# Altium PCB PCB.PcbDoc (part 1 of 3)
Units mm, origin at the board's own origin, x right, y up, seen from the top; angles counter-clockwise.
Board outline 68.53 x 53.3 mm, 2 copper layers (Top Layer, Bottom Layer); 60 components, 48 nets, 220 pads, 55 vias.
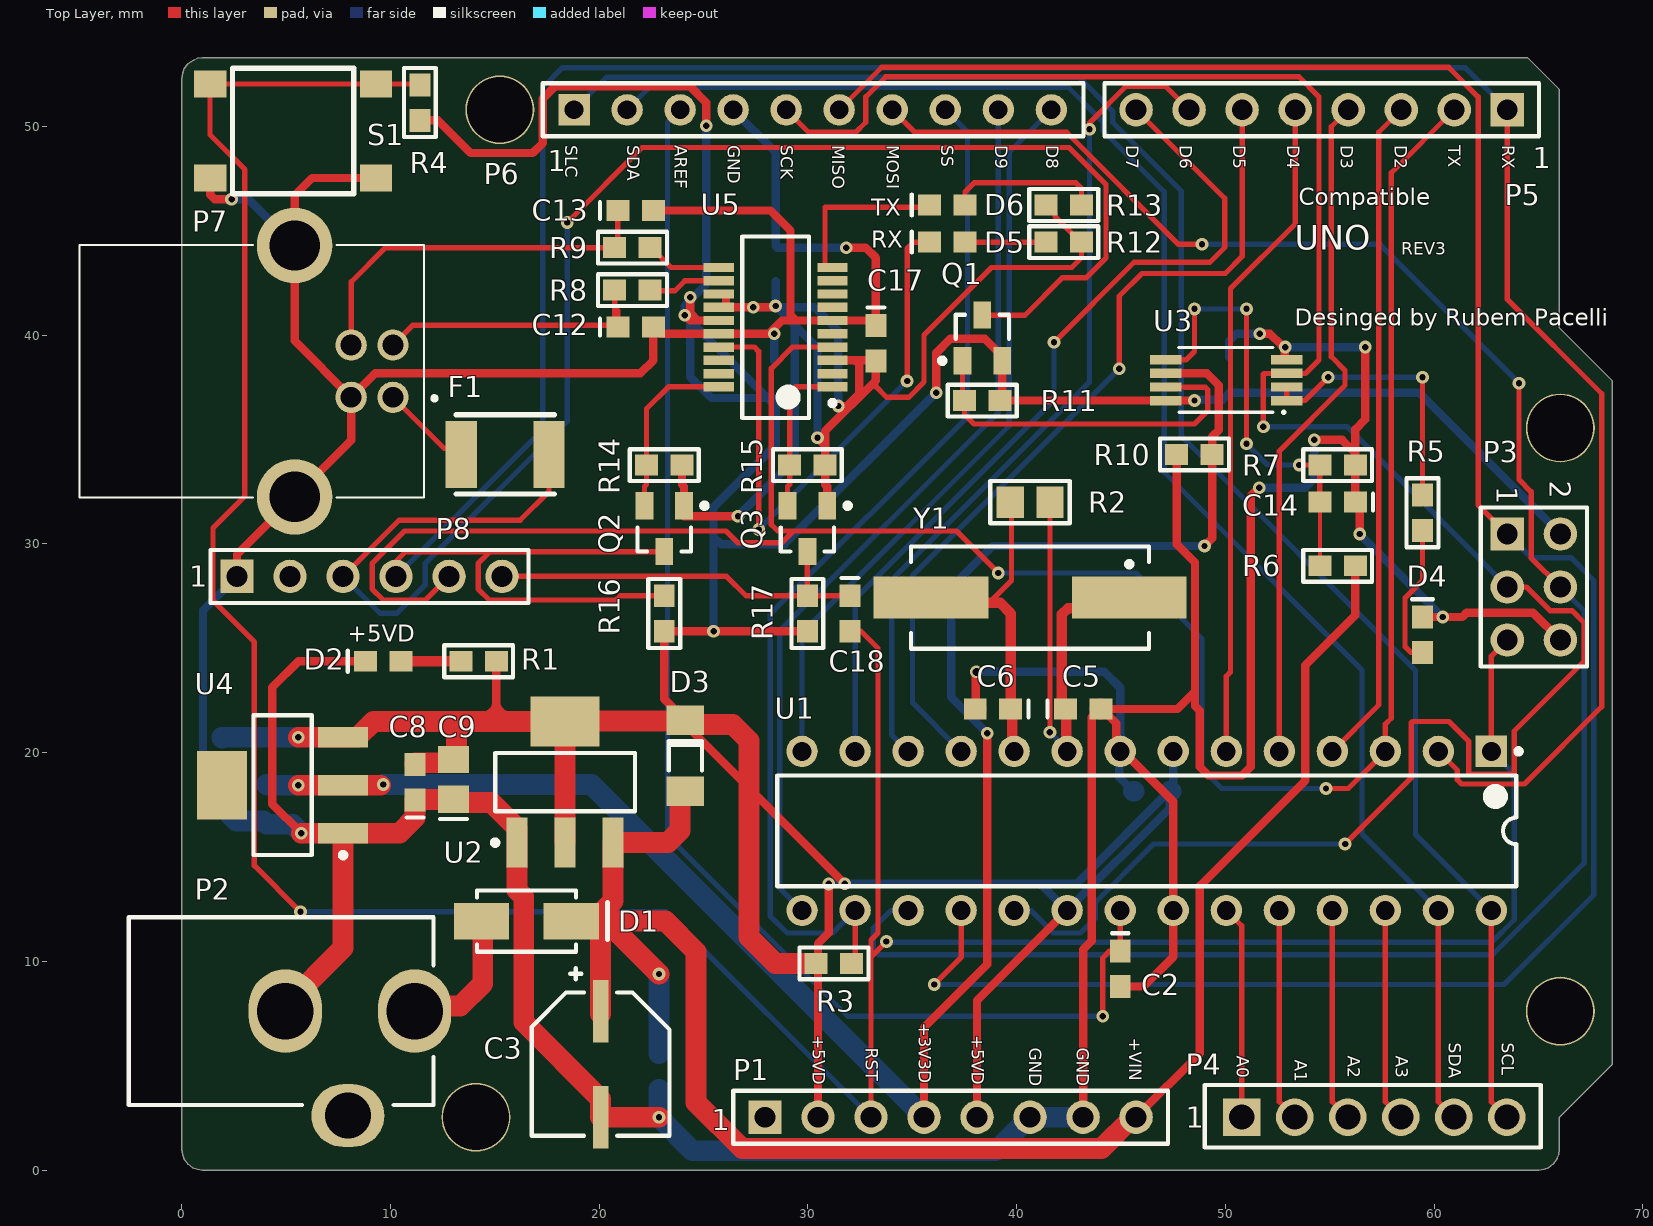
[diagram p0: Top Layer view]
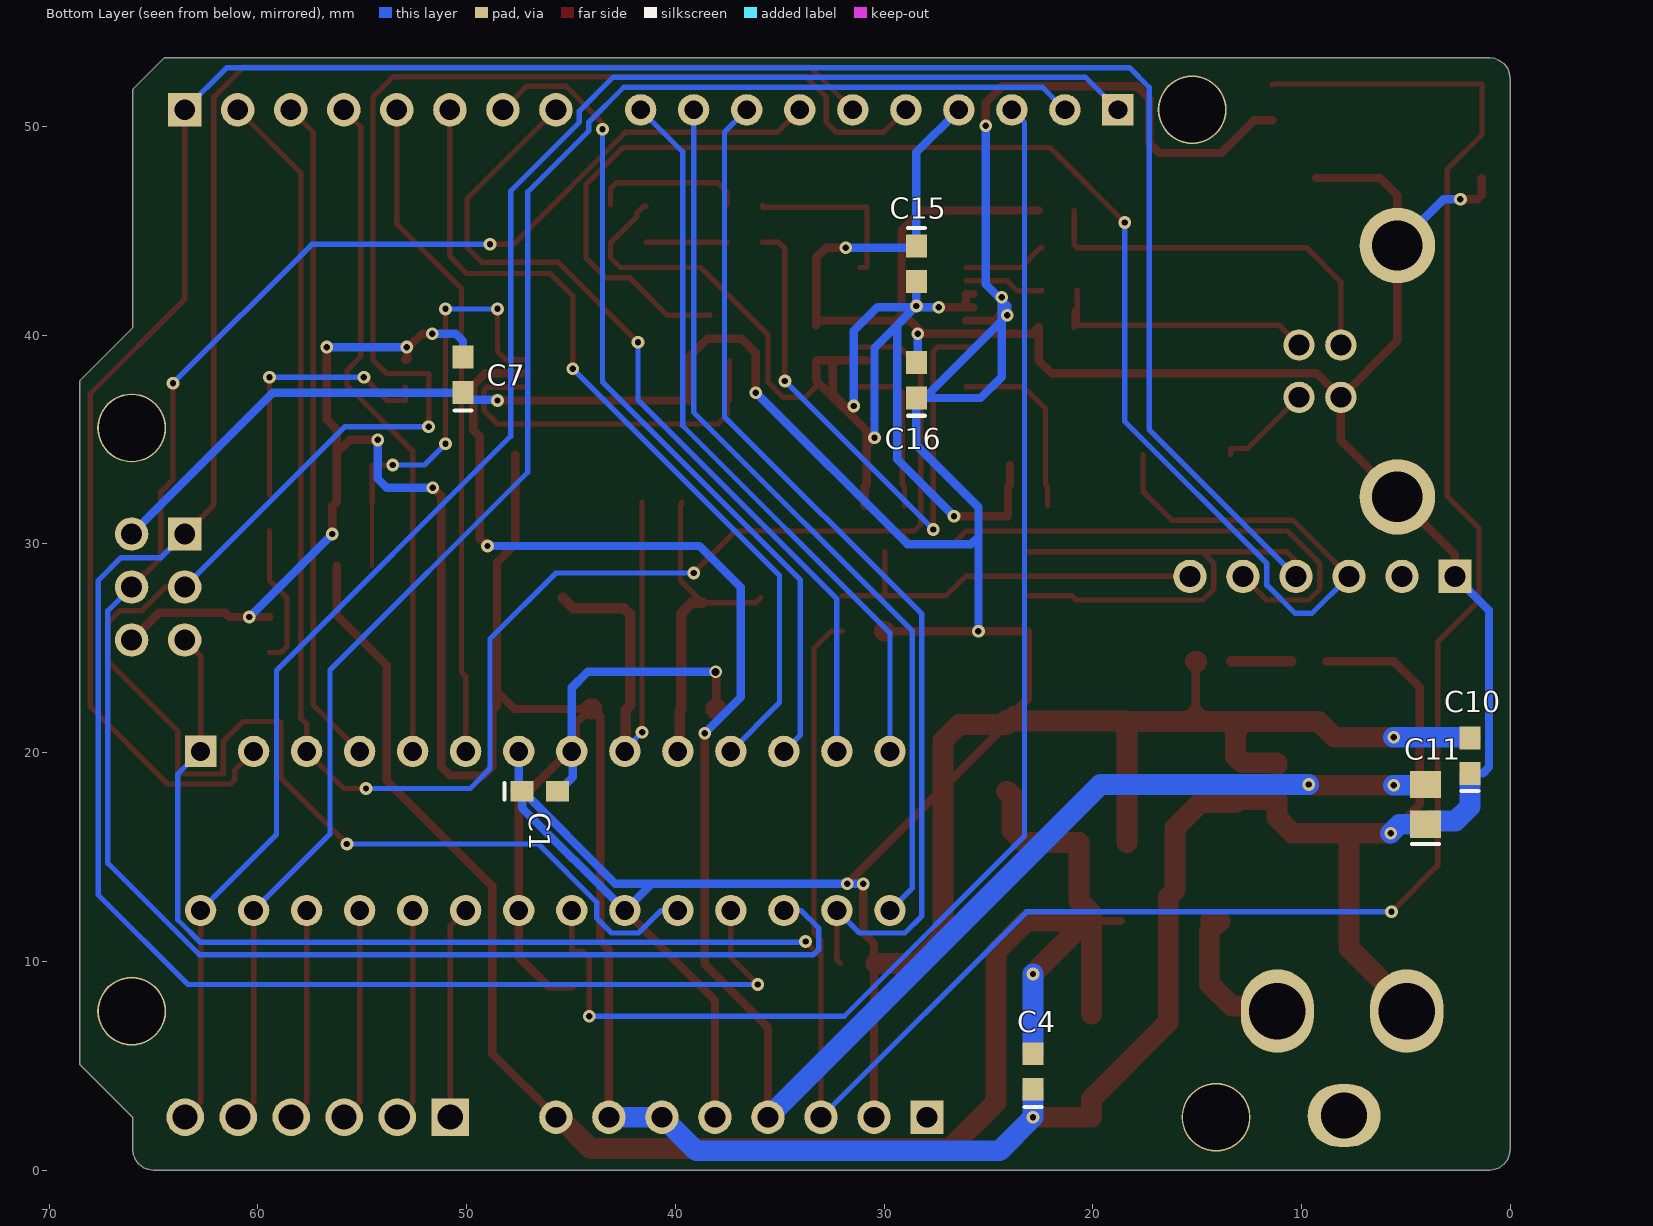
[diagram p1: Bottom Layer view, seen from below]
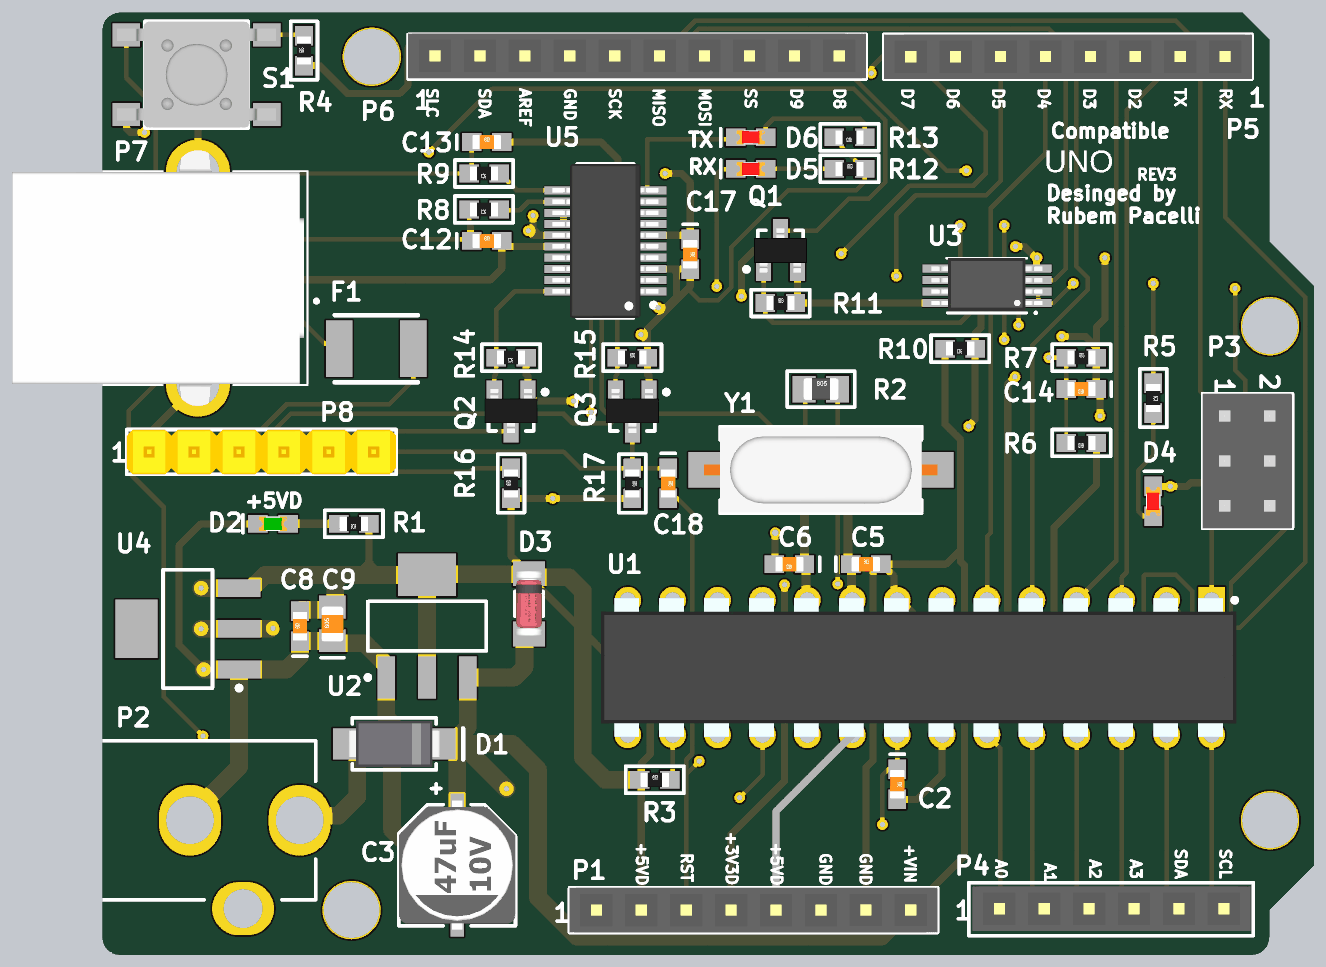
[diagram p3: 3D render of the assembled board from above, using the file's embedded part models]
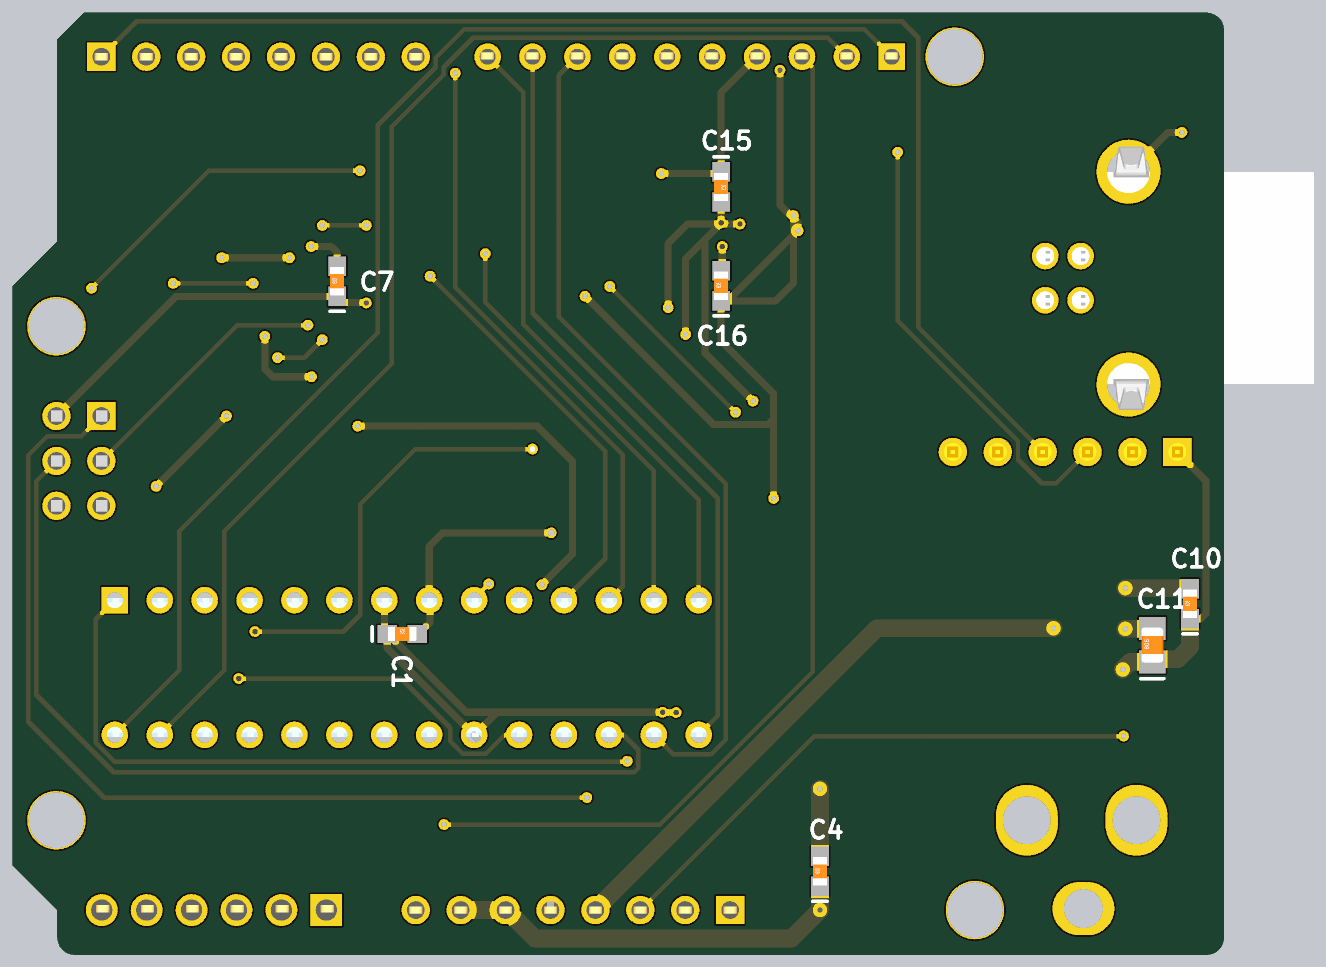
[diagram p4: 3D render of the assembled board from below, using the file's embedded part models]

## Layer stack, top to bottom
Top Solder: solder mask 0.0102, Solder Resist, Dk 3.5
Top Layer: signal copper 0.0356
Dielectric 1: dielectric 0.32, FR-4, Dk 4.8
Bottom Layer: signal copper 0.0356
Bottom Solder: solder mask 0.0102, Solder Resist, Dk 3.5

## Board outline
0.296,0.296 0.127,0.508 0.042,0.741 0,0.994 0,52.284 0.042,52.559 0.127,52.792 0.296,53.004 0.508,53.152 0.741,53.258 0.994,53.3 64.472,53.3 65.996,51.777 65.996,40.351 68.535,37.811 68.535,5.078 65.996,2.539 65.996,0.994 65.953,0.741 65.869,0.508 65.699,0.296 65.488,0.127 65.255,0.042 65.001,0 0.994,0 0.741,0.042 0.508,0.127

## Design rules (kind name [scope] priority, off if disabled: settings)
Clearance [All] p1: gap=0.178 ignorepadtopadclearanceinfootprint=FALSE
HoleSize [All] p1: absolutevalues=TRUE maxlimit=3.302 minlimit=0.025 maxpercent=80.000 minpercent=20.000
MinimumSolderMaskSliver [All] p1: minsoldermaskwidth=0.084
MinimumSolderMaskSliver "MinimumSolderMaskSliver - Top" [OnLayer('Top Layer') vs OnLayer('Top Layer')] p2: minsoldermaskwidth=0.084
MinimumSolderMaskSliver "MinimumSolderMaskSliver - Bottom" [OnLayer('Bottom Layer') vs OnLayer('Bottom Layer')] p3: minsoldermaskwidth=0.084
PolygonConnect [All] p1: connectstyle=Relief reliefconductorwidth=0.254 reliefentries=4 polygonreliefangle="90 Angle" airgapwidth=0.254
RoutingVias [All] p1: holewidth=0.305 width=0.61 viastyle="Through Hole" minholewidth=0.203 minwidth=0.406 maxholewidth=0.508 maxwidth=1.016
SilkToSilkClearance [All] p1: silktosilkclearance=0.127
SilkToSolderMaskClearance [IsPad] p1: minsilkscreentomaskgap=0.102 clearancetoexposedcopper=TRUE
SolderMaskExpansion [All] p1: expansion=0.102
Width "Power Width" [InNetClass('Power Nets')] p1: maxlimit=1 minlimit=0.254 preferedwidth=0.4
Width [All] p2: maxlimit=0.5 minlimit=0.2 preferedwidth=0.254
26 further rules are at their usual default settings.

## Classes and differential pairs
net class "Power Nets": +3V3D +3V3E +5VD +VIN GND NetD1_1
component class U_Sheet2: C12 C13 C14 C15 C16 C17 C18 D5 D6 F1 P7 P8 Q1 Q2 Q3 R6 R7 R8 R9 R10 R11 R12 R13 R14 R15 R16 R17 U5
component class U_Sheet1: C1 C2 C3 C4 C5 C6 C7 C8 C9 C10 C11 D1 D2 D3 D4 P1 P2 P3 P4 P5 P6 R1 R2 R3 R4 R5 S1 U1 U2 U3 U4 Y1

## Components (designator, comment, footprint, x,y, rotation, side; value= is the part's Value field where it differs from the comment)
C1 "0.1uF 25V" C1608[0603] 46.482,18.156 r180 bottom value=1
C2 "0.1uF 25V" C1608[0603] 44.958,9.652 r270 top value=1
C3 "47uF 25V" Cap_Al_SMD_C6_6.6x6.6mm 20.066,5.08 r90 top
C4 "0.1uF 50V" C1608[0603] 22.86,4.73 r90 bottom value=1
C5 "20pF" C1608[0603] 43.18,22.098 r0 top value=1
C6 "20pF" C1608[0603] 38.862,22.098 r180 top value=1
C7 "0.1uF 25V" C1608[0603] 50.165,38.1 r90 bottom value=1
C8 "0.1uF 50V" C1608[0603] 11.176,18.594 r90 top value=1
C9 "10uF 10V" C2012[0805] 13.015,18.721 r90 top value=1
C10 "0.1uF 25V" C1608[0603] 1.93,19.863 r90 bottom value=1
C11 "1uF 25V" C2012[0805] 4.064,17.526 r90 bottom
C12 "0.1uF 25V" C1608[0603] 21.739,40.386 r0 top value=1
C13 "0.1uF 25V" C1608[0603] 21.739,45.974 r0 top value=1
C14 "0.1uF 25V" C1608[0603] 55.372,32.004 r180 top value=1
C15 "0.1uF 25V" C1608[0603] 28.448,43.434 r270 bottom value=1
C16 "0.1uF 25V" C1608[0603] 28.448,37.846 r90 bottom value=1
C17 "0.1uF 25V" C1608[0603] 33.25,39.624 r270 top value=1
C18 "0.1uF 25V" C1608[0603] 32.004,26.67 r270 top value=1
D1 "B160-13-F" DO214AC 16.51,11.938 r0 top
D2 "LED" LED-0603-G 9.652,24.384 r180 top
D3 "" SOD-80/MLL34 24.13,19.856 r90 top
D4 "LED" LED-0603-R 59.436,25.654 r90 top
D5 "RX" LED-0603-R 36.668,44.461 r180 top
D6 "TX" LED-0603-R 36.668,46.239 r180 top
F1 "" MF-MSMF050 15.494,34.29 r0 top
P1 "Header 8" HDR1X8F 27.94,2.54 r0 top
P2 "Barrel Jack" BARREL2.5 -2.54,7.62 r0 top
P3 "ICSP" HDR2X3M 63.5,30.48 r270 top
P4 "Header 6" HDR1X6F 50.628,2.34 r0 top
P5 "IOL" HDR1X8F 63.5,50.8 r180 top
P6 "I/O" HDR1X10 18.796,50.8 r0 top
P7 "" USBB1HSB6 3.658,38.278 r270 top
P8 "PROG" HDR1X6m 2.646,28.448 r0 top
Q1 "FDN340P" SOT23 38.354,39.878 r0 top
Q2 "BSS138" SOT23 23.114,30.734 r180 top
Q3 "BSS138" SOT23 29.972,30.734 r180 top
R1 "270R" R1608[0603] 14.224,24.384 r180 top value=0
R2 "1M" R2012[0805] 40.64,32.004 r0 top value=0
R3 "100k" R1608[0603] 31.242,9.906 r0 top value=0
R4 "10k" R1608[0603] 11.408,51.147 r90 top value=0
R5 "560R" R1608[0603] 59.436,31.496 r270 top value=0
R6 "10k" R1608[0603] 55.372,28.956 r180 top value=0
R7 "10k" R1608[0603] 55.372,33.782 r0 top value=0
R8 "10k" R1608[0603] 21.59,42.164 r180 top value=0
R9 "10k" R1608[0603] 21.59,44.196 r180 top value=0
R10 "10k" R1608[0603] 48.514,34.29 r180 top value=0
R11 "10k" R1608[0603] 38.352,36.871 r0 top value=0
R12 "1k" R1608[0603] 42.256,44.461 r0 top value=0
R13 "1k" R1608[0603] 42.256,46.239 r180 top value=0
R14 "10k" R1608[0603] 23.116,33.782 r180 top value=0
R15 "10k" R1608[0603] 29.972,33.782 r0 top value=0
R16 "10k" R1608[0603] 23.114,26.67 r90 top value=0
R17 "10k" R1608[0603] 29.972,26.67 r270 top value=0
S1 "" PB-SW-SMT 5.334,49.784 r180 top
U1 "ATmega328P-PU" DIP28 46.228,16.256 r270 top
U2 "Linear Regulator" SOT223_N#1 18.365,18.594 r90 top
U3 "Amp-Op" TSSOP8 50.038,37.846 r180 top
U4 "Linear Regulator" SOT223_N#2 4.831,18.445 r180 top
U5 "FT231XS-R" "SSOP - 20" 28.448,40.386 r180 top
Y1 "16MHz" CRYSTAL-HC49/4H_SMX 40.64,27.432 r180 top

## Footprints (in the part's own frame and the unit in brackets; to place one, negate y for a bottom-side part, rotate by r counter-clockwise, add the part's x,y. Pads: shape width x height; smd on the part's side, far side on the other; paste and mask are expansions set on the pad)
BARREL2.5 [mm] "DC Power Jack, 2.5mm, KLD Series, PCB Mount"
  oval 3.5x4 hole 2.7: 1(13.7,0) 2(7.5,0)
  oval 3.5x3 hole 2.2: 3(10.5,-5)
  silkscreen extent 0,-4.5 14.6,4.5, body extent 0,-4.45 14.54,4.56, height 11
C1608[0603] [mm] "Chip Capacitor; Body 1.6 x 0.8 mm (LxW typ)"
  rect 1.1x1 smd: 1(-0.85,0) 2(0.85,0)
  silkscreen extent -1.7,-0.4 -1.7,0.4, body extent -0.8,-0.4 0.8,0.4, height 0.3
C2012[0805] [mm] "Chip Capacitor; Body 2.0 x 1.2 mm (LxW typ)"
  rect 1.3x1.5 smd: 1(-0.95,0) 2(0.95,0)
  silkscreen extent -1.9,-0.65 -1.9,0.65, body extent -1,-0.62 1,0.63, height 0.8
Cap_Al_SMD_C6_6.6x6.6mm [mm]
  rect 3x0.75 smd: 1(2.54,0) 2(-2.54,0)
  silkscreen extent -3.43,-3.3 4.6,3.3, body extent -3.65,-3.3 3.65,3.3, height 5.9
CRYSTAL-HC49/4H_SMX [mm] "Quartz Crystal, SM; Body 13.4 (inc. leads) x 4.9 mm (LxW max)"
  rect 5.5x2 smd: 1(-4.75,0) 2(4.75,0)
  silkscreen extent -5.7,-2.45 5.7,2.45, body extent -6.6,-2.4 6.6,2.4, height 4.32
DIP28 [mm] "28-Pin Plastic Dual In-Line Package (PDIP)"
  rect 1.5x1.5 hole 0.9: 1(-3.81,16.51)
  round 1.5 hole 0.9: 2(-3.81,13.97) 3(-3.81,11.43) 4(-3.81,8.89) 5(-3.81,6.35) 6(-3.81,3.81) 7(-3.81,1.27) 8(-3.81,-1.27) 9(-3.81,-3.81) 10(-3.81,-6.35) 11(-3.81,-8.89) 12(-3.81,-11.43) 13(-3.81,-13.97) 14(-3.81,-16.51) 15(3.81,-16.51) 16(3.81,-13.97) 17(3.81,-11.43) 18(3.81,-8.89) 19(3.81,-6.35) 20(3.81,-3.81) 21(3.81,-1.27) 22(3.81,1.27) 23(3.81,3.81) 24(3.81,6.35) 25(3.81,8.89) 26(3.81,11.43) 27(3.81,13.97) 28(3.81,16.51)
  silkscreen extent -3.93,-17.7 2.65,17.94, body extent -3.94,-18.03 3.94,17.91, height 4.65
DO214AC [mm]
  rect 2.65x1.75 smd: 1(-2.15,0) 2(2.15,0)
  silkscreen extent -2.37,-1.47 3.89,1.47, body extent -2.6,-1.3 2.6,1.3, height 2.4
HDR1X6F [mm] "Manufacturer Part Number  PPPC061LFBN-RC"
  rect 1.8x1.8 / inner round 1.8 / far side rect 1.8x1.8 hole 1.2: 1(0.15,0.2)
  round 1.8 hole 1.2: 2(2.69,0.2) 3(5.23,0.2) 4(7.77,0.2) 5(10.31,0.2) 6(12.85,0.2)
  silkscreen extent -1.62,-1.25 14.47,1.75, body extent -1.42,-0.99 14.32,1.55, height 8.9
HDR1X6m [mm] "Connector; Header; 6 Position"
  rect 1.6x1.6 hole 1: 1(0,0)
  round 1.6 hole 1: 2(2.54,0) 3(5.08,0) 4(7.62,0) 5(10.16,0) 6(12.7,0)
  silkscreen extent -1.27,-1.27 13.97,1.27, body extent -1.27,-1.27 13.97,1.27, height 9.55
HDR1X8F [mm] "Connector; Header; 8 Position"
  rect 1.6x1.6 hole 1: 1(0,0)
  round 1.6 hole 1: 2(2.54,0) 3(5.08,0) 4(7.62,0) 5(10.16,0) 6(12.7,0) 7(15.24,0) 8(17.78,0)
  silkscreen extent -1.52,-1.27 19.3,1.27, body extent -1.52,-1.27 19.3,1.27, height 8.55
HDR1X10 [mm] "Connector; Header; 10 Position"
  rect 1.5x1.5 hole 0.9: 1(0,0)
  round 1.5 hole 0.9: 2(2.54,0) 3(5.08,0) 4(7.62,0) 5(10.16,0) 6(12.7,0) 7(15.24,0) 8(17.78,0) 9(20.32,0) 10(22.86,0)
  silkscreen extent -1.5,-1.27 24.4,1.27, body extent -1.5,-1.22 24.4,1.32, height 8.5
HDR2X3M [mm] "Connector; Header; 3x2 Position"
  rect 1.6x1.6 hole 1: 1(0,0)
  round 1.6 hole 1: 2(0,2.54) 3(2.54,0) 4(2.54,2.54) 5(5.08,0) 6(5.08,2.54)
  silkscreen extent -1.27,-1.27 6.35,3.81, body extent -1.27,-1.27 6.35,3.77, height 8.5
LED-0603-G [mm] "0603 Green LED"
  rect 1.1x1 smd: 1(-0.85,0) 2(0.85,0)
  silkscreen extent 1.7,-0.5 1.7,0.5, body extent -0.8,-0.4 0.8,0.4, height 0.6
LED-0603-R [mm] "0603 Red LED"
  rect 1.1x1 smd: 1(-0.85,0) 2(0.85,0)
  silkscreen extent 1.7,-0.5 1.7,0.5, body extent -0.8,-0.4 0.8,0.4, height 0.6
MF-MSMF050 [mm] "Resettable Fuse"
  rect 1.5x3.2 smd: 1(-2.1,0) 2(2.1,0)
  silkscreen extent -2.35,-1.9 2.35,1.9, body extent -2.35,-1.7 2.35,1.7, height 0.85
PB-SW-SMT [mm] "SMT TACT SWITCH 6MM"
  rect 1.55x1.3 smd: 1(-3.975,2.25) 1(3.975,2.25) 2(-3.975,-2.25) 2(3.975,-2.25)
  silkscreen extent -2.9,-3 2.9,3, body extent -4.5,-3 4.5,3, height 4.3
R1608[0603] [mm] "Chip Resistor; Body 1.6 x 0.8 mm (LxW typ)"
  rect 1.1x1 smd: 1(-0.85,0) 2(0.85,0)
  silkscreen extent -1.65,-0.76 1.65,0.76, body extent -0.8,-0.4 0.8,0.4, height 0.3
R2012[0805] [mm] "Chip Resistor; Body 2.0 x 1.3 mm (LxW typ)"
  rect 1.3x1.5 smd: 1(-0.95,0) 2(0.95,0)
  silkscreen extent -1.9,-1.02 1.91,1.02, body extent -1,-0.62 1,0.63, height 0.8
SOD-80/MLL34 [mm] "Metal Electrode Face (MELF) Diode; Body 3.5 x 1.7 mm (LxDia)"
  rect 1.4x1.8 smd: 1(-1.7,0) 2(1.7,0)
  silkscreen extent -0.7,-0.8 0.7,0.8, body extent -1.82,-0.8 1.88,0.8, height 1.6
SOT23 [mm] "SOT-23; 3 Leads; Body 3.0 x 2.6 mm, inc. leads (LxW max)"
  rect 0.85x1.3 smd: 1(-0.95,-1.1) 2(0.95,-1.1) 3(0,1.1)
  silkscreen extent -2.05,-1.22 1.27,1.1, body extent -1.5,-1.29 1.5,1.21, height 1.12
SOT223_N#1 [mm] "SOT223, 4-Leads, Body 6.5x3.5mm, Pitch 2.3mm, Lead Span 7mm, IPC Medium Density"
  rect 2.4x1 smd: 1(-2.9,2.3) 2(-2.9,0) 3(-2.9,-2.3)
  rect 2.4x3.3 smd: 2(2.9,0)
  silkscreen extent -3.02,-3.35 1.4,3.47, body extent -1.85,-3.35 1.85,3.35, height 1.7
SOT223_N#2 [mm] "SOT223, 4-Leads, Body 6.5x3.5mm, Pitch 2.3mm, Lead Span 7mm, IPC Medium Density"
  rect 2.4x1 smd: 1(-2.9,2.3) 2(-2.9,0) 3(-2.9,-2.3)
  rect 2.4x3.3 smd: 4(2.9,0)
  silkscreen extent -3.03,-3.35 1.4,3.47, body extent -1.85,-3.35 1.85,3.35, height 1.7
"SSOP - 20" [mm] "SOP, 20-Leads, Body 8,65x3,90mm, Pitch 0,64mm, IPC Medium Density"
  rect 1.45x0.45 smd mask+0.05: 1(-2.725,2.857) 2(-2.725,2.222) 3(-2.725,1.587) 4(-2.725,0.952) 5(-2.725,0.317) 6(-2.725,-0.318) 7(-2.725,-0.953) 8(-2.725,-1.588) 9(-2.725,-2.223) 10(-2.725,-2.858) 11(2.725,-2.858) 12(2.725,-2.223) 13(2.725,-1.588) 14(2.725,-0.953) 15(2.725,-0.318) 16(2.725,0.317) 17(2.725,0.952) 18(2.725,1.587) 19(2.725,2.222) 20(2.725,2.857)
  silkscreen extent -2.85,-4.35 1.6,4.35, body extent -3,-4.35 3,4.35, height 1.75
TSSOP8 [mm]
  rect 1.5x0.45 smd paste+0 mask+0.05: 1(-2.9,0.975)
  rect 1.5x0.45 smd mask+0.05: 2(-2.9,0.325) 3(-2.9,-0.325) 4(-2.9,-0.975) 5(2.9,-0.975) 6(2.9,-0.325) 7(2.9,0.325) 8(2.9,0.975)
  silkscreen extent -2.75,-1.56 2.28,1.54, body extent -3.12,-1.58 3.16,1.42, height 1.09
USBB1HSB6 [mm]
  round 1.5 hole 1: 1(1.25,6.46) 2(-1.25,6.46) 3(-1.25,4.46) 4(1.25,4.46)
  round 3.615 hole 2.41: 5(-6.02,1.75) 6(6.02,1.75)
  silkscreen extent -6.05,-8.55 6.05,8.55, body extent -7.45,-8.75 7.45,7.75, height 10.9

## Part data
C1 C2 C7 C10 C12 C13 C15 C16 C17: library part C, "Capacitor Decoupling", Capacitance=100nF, Case/Package=0603, Case Code (Metric)=1608, Dielectric=X7R, Manufacturer Part Number=GCM188R71E104KA57D, Max Operating Temperature=125°C, Min Operating Temperature=-55°C, Package Quantity=4000, Ratings=AEC-Q200, Supplier Part Number 1=GCM188R71E104KA57D-ND, Tolerance=10%, Voltage=25V, Case Code (Imperial)=0603, Depth=0.8mm, Height=0.8mm, Lead Free="Lead Free", Length=1.6mm, Mount="Surface Mount", Packaging="Tape and Reel", Radiation Hardening=No, Stock 1=0, Supplier 1=Digi-Key, Termination=SMD/SMT, Thickness=0.035inch, Voltage Rating=25V, Voltage Rating (DC)=25V, Width=0.8mm
C3: library part CP, "Polarized Capacitor - Power Entry", Capacitance=47uF, Case/Package=Radial, Leakage Current=11.7uA, Manufacturer Part Number=EEE-HA1E470WP, Max Operating Temperature=105°C, Min Operating Temperature=-40°C, Package Quantity=1, Ripple Current=70mA, Supplier Part Number 1=PCE4206DKR-ND, Tolerance=20%, Voltage=25V, ComponentLink1Description=http://uk.rs-online.com/webdocs/102e/0900766b8102e3f9.pdf, ComponentLink1URL=http://uk.rs-online.com/webdocs/102e/0900766b8102e3f9.pdf, ComponentLink2Description=http://industrial.panasonic.com/www-data/pdf/ABA0000/ABA0000CE3.pdf, ComponentLink2URL=http://industrial.panasonic.com/www-data/pdf/ABA0000/ABA0000CE3.pdf, ComponentLink3Description=http://www.farnell.com/datasheets/1446029.pdf, ComponentLink3URL=http://www.farnell.com/datasheets/1446029.pdf, ComponentLink4Description=http://www.farnell.com/datasheets/2059663.pdf, ComponentLink4URL=http://www.farnell.com/datasheets/2059663.pdf, ComponentLink5Description=https://www.alliedelec.com/m/d/7ecf71cebe655f70ab90926cc286bede.pdf, ComponentLink5URL=https://www.alliedelec.com/m/d/7ecf71cebe655f70ab90926cc286bede.pdf, ComponentLink6Description=http://www.jameco.com/Jameco/Products/ProdDS/1984291.pdf, ComponentLink6URL=http://www.jameco.com/Jameco/Products/ProdDS/1984291.pdf, Contact Plating=Tin, Diameter=6.3mm, Height=5.4mm, Height - Seated (Max)=0.213inch, Lead Diameter=0.65mm, Lead Free="Lead Free", Lead Pitch=1.8mm, Length=5.5mm, Life (Hours)=1000Hour, Mount="Surface Mount", Packaging="Tape and Reel", Pricing 1="1=0.43, 10=0.301, 100=0.1808, 500=0.13558 (USD)", Radiation Hardening=No, REACH SVHC=Unknown, Ripple Current (AC)=70mA, Stock 1=156126, Supplier 1=Digi-Key, Termination=SMD/SMT, Voltage Rating=25V, Voltage Rating (DC)=25V, Width=650um
C4: library part C, "Decoupling Capacitor", Capacitance=100nF, Case/Package=0603, Case Code (Metric)=1608, Dielectric=X7R, Dielectric Material=Ceramic, Manufacturer Part Number=C1608X7R1H104M080AA, Max Operating Temperature=125°C, Min Operating Temperature=-55°C, Package Quantity=1, Supplier Part Number 1=445-5098-6-ND, Tolerance=20%, Voltage Rating=50V, Case Code (Imperial)=0603, ComponentLink1Description=http://www.farnell.com/datasheets/1571323.pdf, ComponentLink1URL=http://www.farnell.com/datasheets/1571323.pdf, ComponentLink2Description=https://product.tdk.com/info/en/catalog/spec/mlccspec_commercial_general_midvoltage_en.pdf, ComponentLink2URL=https://product.tdk.com/info/en/catalog/spec/mlccspec_commercial_general_midvoltage_en.pdf, ComponentLink3Description=http://www.tdk.co.jp/tefe02/e412_c.pdf, ComponentLink3URL=http://www.tdk.co.jp/tefe02/e412_c.pdf, Composition=Ceramic, Depth=0.8mm, Height=0.8mm, Lead Free="Lead Free", Length=1.6mm, Mount="Surface Mount", Number of Pins=2, Packaging="Tape and Reel", Pricing 1="1=0.1, 10=0.074, 100=0.0331, 500=0.02366, 1000=0.0186 (USD)", Radiation Hardening=No, REACH SVHC="No SVHC", Stock 1=0, Supplier 1=Digi-Key, Termination=SMD/SMT, Thickness=0.037inch, Voltage Rating (DC)=50V, Weight=7.1E-05oz, Width=0.031inch
C5 C6: library part C, "Capacitor Crystal", Case/Package=0603, Case Code (Metric)=1608, Dielectric=C0G, Manufacturer Part Number=CL10C200JB8NNNC, Max Operating Temperature=125°C, Min Operating Temperature=-55°C, Package Quantity=1, Supplier Part Number 1=1276-1187-6-ND, Temperature Coefficient=300ppm/°C, Tolerance=5%, Voltage=50V, Capacitance=20pF, Case Code (Imperial)=0603, Depth=0.8mm, Height=0.8mm, Length=1.6mm, Mount="Surface Mount", Packaging="Tape and Reel", Pricing 1="1=0.1, 10=0.048, 100=0.0214, 500=0.01532, 1000=0.01203 (USD)", Radiation Hardening=No, Stock 1=40000, Supplier 1=Digi-Key, Thickness=0.035inch, Voltage Rating=50V, Width=0.031inch
C8: library part C, "Capacitor Decoupling", Capacitance=100nF, Case/Package=0603, Case Code (Metric)=1608, Dielectric=X7R, Dielectric Material=Ceramic, Manufacturer Part Number=C1608X7R1H104M080AA, Max Operating Temperature=125°C, Min Operating Temperature=-55°C, Package Quantity=1, Supplier Part Number 1=445-5098-6-ND, Tolerance=20%, Voltage Rating=50V, Case Code (Imperial)=0603, ComponentLink1Description=http://www.farnell.com/datasheets/1571323.pdf, ComponentLink1URL=http://www.farnell.com/datasheets/1571323.pdf, ComponentLink2Description=https://product.tdk.com/info/en/catalog/spec/mlccspec_commercial_general_midvoltage_en.pdf, ComponentLink2URL=https://product.tdk.com/info/en/catalog/spec/mlccspec_commercial_general_midvoltage_en.pdf, ComponentLink3Description=http://www.tdk.co.jp/tefe02/e412_c.pdf, ComponentLink3URL=http://www.tdk.co.jp/tefe02/e412_c.pdf, Composition=Ceramic, Depth=0.8mm, Height=0.8mm, Lead Free="Lead Free", Length=1.6mm, Mount="Surface Mount", Number of Pins=2, Packaging="Tape and Reel", Pricing 1="1=0.1, 10=0.074, 100=0.0331, 500=0.02366, 1000=0.0186 (USD)", Radiation Hardening=No, REACH SVHC="No SVHC", Stock 1=0, Supplier 1=Digi-Key, Termination=SMD/SMT, Thickness=0.037inch, Voltage Rating (DC)=50V, Weight=7.1E-05oz, Width=0.031inch
C9: library part C, "Capacitor Decoupling", Capacitance=10uF, Case/Package=0603, Case Code (Metric)=1608, Dielectric Material=Ceramic, Manufacturer Part Number=C1608JB1A106K080AC, Max Operating Temperature=85°C, Min Operating Temperature=-25°C, Package Quantity=4000, Supplier Part Number 1=445-11201-6-ND, Tolerance=10%, Voltage Rating=10V, Case Code (Imperial)=0603, ComponentLink1Description=https://product.tdk.com/en/products/common/pdf/mlcc_partnumber_description.pdf, ComponentLink1URL=https://product.tdk.com/en/products/common/pdf/mlcc_partnumber_description.pdf, Composition=Ceramic, Height=0.8mm, Lead Free="Lead Free", Length=0.063inch, Mount="Surface Mount", Packaging="Tape and Reel", Pricing 1="1=0.62, 10=0.431, 100=0.2588, 500=0.19406, 1000=0.16388 (USD)", Stock 1=22257, Supplier 1=Digi-Key, Termination=SMD/SMT, Thickness=0.035inch, Voltage Rating (DC)=10V, Width=0.8mm
C11: library part C, "Capacitor Decoupling", Capacitance=1uF, Case/Package=0805, Case Code (Metric)=2012, Dielectric=X7R, Dielectric Material=Ceramic, Manufacturer=TDK, Manufacturer Part Number=C2012X7R1E105K125AB, Max Operating Temperature=125°C, Min Operating Temperature=-55°C, Package Quantity=1, Supplier Part Number 1=445-1354-1-ND, Tolerance=10%, Voltage=25V, Case Code (Imperial)=0805, Composition=Ceramic, Depth=1.25mm, Height=1.25mm, Lead Free="Lead Free", Length=2mm, Mount="Surface Mount", Number of Pins=2, Packaging="Tape and Reel", Pricing 1="1=0.16, 10=0.115, 100=0.054, 500=0.0379, 1000=0.03137 (USD)", Radiation Hardening=No, REACH SVHC="No SVHC", Stock 1=0, Supplier 1=Digi-Key, Termination=SMD/SMT, Thickness=0.057inch, Voltage Rating=25V, Voltage Rating (DC)=25V, Weight=0.000194oz, Width=1.25mm
C14: library part C, "Decoupling Capacitor", Capacitance=100nF, Case/Package=0603, Case Code (Metric)=1608, Dielectric=X7R, Manufacturer Part Number=GCM188R71E104KA57D, Max Operating Temperature=125°C, Min Operating Temperature=-55°C, Package Quantity=4000, Ratings=AEC-Q200, Supplier Part Number 1=GCM188R71E104KA57D-ND, Tolerance=10%, Voltage=25V, Case Code (Imperial)=0603, Depth=0.8mm, Height=0.8mm, Lead Free="Lead Free", Length=1.6mm, Mount="Surface Mount", Packaging="Tape and Reel", Radiation Hardening=No, Stock 1=0, Supplier 1=Digi-Key, Termination=SMD/SMT, Thickness=0.035inch, Voltage Rating=25V, Voltage Rating (DC)=25V, Width=0.8mm
C18: library part C, "Capacitor Coupling", Capacitance=100nF, Case/Package=0603, Case Code (Metric)=1608, Dielectric=X7R, Manufacturer Part Number=GCM188R71E104KA57D, Max Operating Temperature=125°C, Min Operating Temperature=-55°C, Package Quantity=4000, Ratings=AEC-Q200, Supplier Part Number 1=GCM188R71E104KA57D-ND, Tolerance=10%, Voltage=25V, Case Code (Imperial)=0603, Depth=0.8mm, Height=0.8mm, Lead Free="Lead Free", Length=1.6mm, Mount="Surface Mount", Packaging="Tape and Reel", Radiation Hardening=No, Stock 1=0, Supplier 1=Digi-Key, Termination=SMD/SMT, Thickness=0.035inch, Voltage Rating=25V, Voltage Rating (DC)=25V, Width=0.8mm
D1: library part D, "Diode", Average Rectified Current=1A, Capacitance=110pF, Case/Package=SMA, Forward Voltage=700mV, Max Forward Surge Current (Ifsm)=30A, Max Operating Temperature=150°C, Max Repetitive Reverse Voltage (Vrrm)=60V, Min Operating Temperature=-65°C, Package Quantity=5000, Peak Reverse Current=500uA, Supplier Part Number 1=B160-FDIDKR-ND, ComponentLink1Description=https://www.diodes.com/assets/Datasheets/ds13002.pdf, ComponentLink1URL=https://www.diodes.com/assets/Datasheets/ds13002.pdf, ComponentLink2Description=http://www.farnell.com/datasheets/1911815.pdf, ComponentLink2URL=http://www.farnell.com/datasheets/1911815.pdf, ComponentLink3Description=http://www.diodes.com/datasheets/ds13002.pdf, ComponentLink3URL=http://www.diodes.com/datasheets/ds13002.pdf, ComponentLink4Description=http://www.diodes.com///datasheets/ds13002.pdf, ComponentLink4URL=http://www.diodes.com///datasheets/ds13002.pdf, Contact Plating=Matte,Tin, Current Rating=1A, Element Configuration=Single, Forward Current=1A, Height=2.1mm, Lead Free="Lead Free", Length=4.6mm, Manufacturer Part Number=B160-13-F, Max Reverse Voltage (DC)=60V, Mount="Surface Mount", Number of Pins=2, Output Current=1A, Packaging="Tape and Reel", Peak Non-Repetitive Surge Current=30A, Polarity=Standard, Pricing 1="1=0.37, 10=0.304, 100=0.1615, 500=0.10622, 1000=0.07223 (USD)", Radiation Hardening=No, REACH SVHC="No SVHC", Stock 1=242650, Supplier 1=Digi-Key, Termination=SMD/SMT, Voltage Rating (DC)=60V, Weight=0.002258oz, Width=2.92mm
D2: "LED indicador visual", Case/Package=0603, Case Code (Metric)=1608, Color=Blue, Forward Current=20mA, Forward Voltage=3.3V, Lens Color=Clear,Colorless, Manufacturer=Kingbright, Manufacturer Part Number=APT1608QBC/D, Max Operating Temperature=85°C, Min Operating Temperature=-40°C, Package Quantity=2000, Supplier Part Number 1=604-APT1608QBC/D, Case Code (Imperial)=0603, ComponentLink1Description=http://www.kingbrightusa.com/images/catalog/SPEC/APT1608QBC-D.pdf, ComponentLink1URL=http://www.kingbrightusa.com/images/catalog/SPEC/APT1608QBC-D.pdf, ComponentLink2Description=http://www.mouser.com/ds/2/216/APT1608QBC-D-65281.pdf, ComponentLink2URL=http://www.mouser.com/ds/2/216/APT1608QBC-D-65281.pdf, Dominant Wavelength=465nm, Height=0.75mm, Illumination Color=Blue, Lead Free="Lead Free", Length=1.6mm, Lens Style=Clear,Flat, Lens Transparency=Clear, Luminous Intensity=100mcd, Mount="Surface Mount", Number of LEDs=1, Number of Pins=2, Packaging="Tape and Reel", Pricing 1="1=0.49, 10=0.35, 50=0.35, 100=0.229, 1000=0.129, 10000=0.091 (USD)", Stock 1=33663, Supplier 1=Mouser, Test Current=20mA, Viewing Angle=120°, Width=0.8mm
D3: library part D, "Diode Protection", Average Rectified Current=200mA, Current=2A, Forward Voltage=1V, Manufacturer Part Number=LL4148, Max Operating Temperature=175°C, Max Repetitive Reverse Voltage (Vrrm)=100V, Min Operating Temperature=-65°C, Package Quantity=1, Peak Reverse Current=25nA, Power Dissipation=500mW, Supplier Part Number 1=512-LL4148, ComponentLink1Description=http://www.farnell.com/datasheets/1730036.pdf, ComponentLink1URL=http://www.farnell.com/datasheets/1730036.pdf, ComponentLink2Description=https://www.fairchildsemi.com/datasheets/LL/LL4148.pdf, ComponentLink2URL=https://www.fairchildsemi.com/datasheets/LL/LL4148.pdf, ComponentLink3Description=http://www.jameco.com/Jameco/Products/ProdDS/94908.pdf, ComponentLink3URL=http://www.jameco.com/Jameco/Products/ProdDS/94908.pdf, ComponentLink4Description=http://www.mouser.com/ds/2/149/LL4148-70504.pdf, ComponentLink4URL=http://www.mouser.com/ds/2/149/LL4148-70504.pdf, ComponentLink5Description=http://www.farnell.com/datasheets/2037793.pdf, ComponentLink5URL=http://www.farnell.com/datasheets/2037793.pdf, ComponentLink6Description=https://www.verical.com/server-webapp/html/getDatasheet?partID=110057, ComponentLink6URL=https://www.verical.com/server-webapp/html/getDatasheet?partID=110057, ComponentLink7Description=http://www.farnell.com/datasheets/1896420.pdf, ComponentLink7URL=http://www.farnell.com/datasheets/1896420.pdf, Contact Plating=Matte,Tin, Element Configuration=Single, Forward Current=200mA, Height=1.5mm, Lead Free="Lead Free", Length=3.6mm, Max Forward Surge Current (Ifsm)=2A, Max Reverse Voltage (DC)=100V, Max Surge Current=2A, Mount="Surface Mount", Number of Pins=2, Packaging="Tape and Reel", Peak Non-Repetitive Surge Current=2A, Pricing 1="1=0.1, 10=0.087, 50=0.087, 100=0.031, 1000=0.021, 10000=0.014 (USD)", Radiation Hardening=No, REACH SVHC="No SVHC", Recovery Time=4ns, Reverse Recovery Time=4ns, Reverse Voltage=100V, Stock 1=987975, Supplier 1=Mouser, Voltage=100V, Weight=0.01lb, Width=1.5mm
D4: Case/Package=0603, Case Code (Metric)=1608, Colour=Red, Current=2A, Forward Current=30mA, Forward Voltage=2V, Lens Colour=Colorless, Manufacturer Part Number=LTST-C191KRKT, Max Operating Temperature=85°C, Min Operating Temperature=-55°C, Package Quantity=1, Power Dissipation=75mW, Reverse Voltage=5V, Supplier Part Number 1=160-1447-6-ND, Test Current=20mA, Case Code (Imperial)=0603, Depth=0.8mm, Dominant Wavelength=631nm, Height=0.55mm, Illumination Colour=Red, Lead Free="Lead Free", Length=1.6mm, Lens Style=Clear,Colorless,Diffused,Rectangular, Lens Transparency=Clear, Luminous Intensity=54mcd, Mount="Surface Mount", Number of Elements=1, Number of LEDs=1, Number of Pins=2, Packaging="Tape and Reel", Power Rating=75mW, Pricing 1="1=0.29, 10=0.211, 25=0.1556, 100=0.1111, 250=0.07556, 500=0.06666, 1000=0.05222, 2500=0.05111 (USD)", Radiation Hardening=No, Stock 1=978989, Supplier 1=Digi-Key, Viewing Angle=130°, Voltage=2V, Wavelength=639nm, Width=0.8mm
D5 D6: library part LED, "LED visual indicator", Case/Package=0603, Case Code (Metric)=1608, Colour=Yellow, Forward Current=30mA, Forward Voltage=2.4V, Lens Colour=Clear,Colorless, Manufacturer Part Number=LTST-C190KSKT, Max Operating Temperature=85°C, Min Operating Temperature=-55°C, Package Quantity=1, Power Dissipation=75mW, Reverse Voltage=5V, Supplier Part Number 1=160-1437-1-ND, Test Current=20mA, Case Code (Imperial)=0603, Depth=1.6mm, Dominant Wavelength=597nm, Height=0.8mm, Illumination Colour=Yellow, Lead Free="Lead Free", Length=3.2mm, Lens Style=Clear,Colorless,Diffused,Rectangular, Lens Transparency=Clear, Luminous Intensity=180mcd, Mount="Surface Mount", Number of Elements=1, Number of LEDs=1, Number of Pins=2, Packaging="Tape and Reel", Power Rating=75mW, Pricing 1="1=0.29, 10=0.215, 25=0.16, 100=0.1153, 250=0.0798, 500=0.07088, 1000=0.05644 (USD)", Radiation Hardening=No, Stock 1=422639, Supplier 1=Digi-Key, Viewing Angle=130°, Wavelength=588nm, Width=0.8mm
F1: library part MF-MSMF050-2, "Resettable Fuse", Case/Package=1812, Case Code (Metric)=4532, Current Rating=100A, Hold Current=500mA, Max Operating Temperature=85°C, Min Operating Temperature=-40°C, Operating Supply Voltage=15V, Package Quantity=2000, Power Dissipation=800mW, Resistance=150mR, Supplier Part Number 1=MF-MSMF050-2DKR-ND, Trip Current=1A, Approvals=CSA,TUV,UL, Case Code (Imperial)=1812, Contact Plating=Gold, Height=0.85mm, Lead Free="Lead Free", Length=4.73mm, Manufacturer Part Number=MF-MSMF050-2, Max Current Rating=100A, Mount="Surface Mount", Number of Terminals=2, Packaging="Tape and Reel", Pricing 1="1=0.47, 5=0.456, 10=0.441, 50=0.3712, 100=0.3082, 250=0.2802, 500=0.23816, 1000=0.21014 (USD)", Radiation Hardening=No, REACH SVHC="No SVHC", Stock 1=179041, Supplier 1=Digi-Key, Terminal Material=Gold, Termination=SMD/SMT, Time to Trip=0.15s, Voltage Rating=15V, Voltage Rating (DC)=15V, Width=3.41mm
P1: "Header, 8-Pin", Color=Black, Manufacturer=Sullins, Manufacturer Part Number=PPTC081LFBN-RC, Package Quantity=1000, Supplier Part Number 1=S7006-ND, Connector Type=Header,Socket, Contact Material=Bronze, Contact Plating=Tin, Height=8.5mm, Housing Material=Plastic, LatestRevisionDate=17-Jul-2002, LatestRevisionNote="Re-released for DXP Platform.", Lead Free="Lead Free", Length=20.8mm, Mount="Through Hole", Number of Positions=8, Number of Rows=1, Packaging=Bulk, Pitch=0.1inch, Pricing 1="1=0.65, 10=0.608, 400=0.42525, 800=0.3645, 1200=0.33413, 5200=0.29363, 10000=0.2925 (USD)", Publisher="Altium Limited", Stock 1=55095, Supplier 1=Digi-Key, Termination=Solder, Width=2.5mm
P2: library part PWR2.5, "Low Voltage Power Supply Connector", Manufacturer="Memory Protection Devices", Manufacturer Part Number=EJ503A, Supplier Part Number 1=EJ503A-ND, Mount="Through Hole", Pricing 1="1=2.7, 10=2.447, 100=2.0977, 500=1.74806, 1000=1.49834 (USD)", Stock 1=1084, Supplier 1=Digi-Key
P3: library part "Header 3X2", "Header, 3-Pin, Dual row", Colour=Black, Contact Resistance=25mR, Manufacturer=Harwin, Manufacturer Part Number=M20-9720345, Max Current Rating=3A, Max Operating Temperature=105°C, Min Operating Temperature=-40°C, Package Quantity=1000, Supplier Part Number 1=952-1921-ND, Connector Type="Male Pin", Contact Material=Brass, Contact Mating Length=0.276inch, Contact Plating=Gold, Depth=5.08mm, Gender=Male, Housing Colour=Black, Housing Material=Nylon, LatestRevisionDate=17-Jul-2002, LatestRevisionNote="Re-released for DXP Platform.", Length=7.62mm, Mount="Through Hole", Number of Contacts=6, Number of Positions=6, Number of Rows=2, Orientation=Straight, Packaging=Bulk, Pitch=2.54mm, Pricing 1="1=0.33, 10=0.308, 100=0.2156, 500=0.1848, 1000=0.154, 5000=0.132, 10000=0.1232 (USD)", Publisher="Altium Limited", Radiation Hardening=No, Row Spacing=0.1inch, Stock 1=4637, Supplier 1=Digi-Key, Termination=Solder
P4: "Header, 6-Pin", LatestRevisionDate=17-Jul-2002, LatestRevisionNote="Re-released for DXP Platform.", Publisher="Altium Limited"
P5: library part "Header 8", "Header, 8-Pin", Colour=Black, Manufacturer=Sullins, Manufacturer Part Number=PPTC081LFBN-RC, Package Quantity=1000, Supplier Part Number 1=S7006-ND, Connector Type=Header,Socket, Contact Material=Bronze, Contact Plating=Tin, Height=8.5mm, Housing Material=Plastic, LatestRevisionDate=17-Jul-2002, LatestRevisionNote="Re-released for DXP Platform.", Lead Free="Lead Free", Length=20.8mm, Mount="Through Hole", Number of Positions=8, Number of Rows=1, Packaging=Bulk, Pitch=0.1inch, Pricing 1="1=0.65, 10=0.608, 400=0.42525, 800=0.3645, 1200=0.33413, 5200=0.29363, 10000=0.2925 (USD)", Publisher="Altium Limited", Stock 1=21933, Supplier 1=Digi-Key, Termination=Solder, Width=2.5mm
P6: library part "Header 10", "Header, 10-Pin", Color=Black, Manufacturer=Sullins, Manufacturer Part Number=PPTC101LFBN-RC, Package Quantity=1000, Supplier Part Number 1=S7008-ND, Connector Type=Header,Socket, Contact Material=Bronze, Contact Plating=Tin, Height=8.5mm, Housing Material=Plastic, Lead Free="Lead Free", Length=25.9mm, Mount="Through Hole", Number of Positions=10, Number of Rows=1, Packaging=Bulk, Pitch=0.1inch, Pricing 1="1=0.65, 10=0.574, 320=0.45, 640=0.405, 1280=0.36, 5120=0.325 (USD)", Stock 1=22268, Supplier 1=Digi-Key, Termination=Solder, Width=2.5mm
P7: library part USB-B1HSB6, "USB - B Receptacle", Manufacturer="On-Shore Technology", Package Quantity=50, Supplier Part Number 1=ED2983-ND, ComponentLink1Description=http://www.on-shore.com/wp-content/uploads/2015/09/usb-b1hsxx.pdf, ComponentLink1URL=http://www.on-shore.com/wp-content/uploads/2015/09/usb-b1hsxx.pdf, Connector Type=USB, Gender=Receptacle, Manufacturer Part Number=USB-B1HSB6, Mount="Through Hole", Number of Contacts=4, Packaging=Tray, Pricing 1="1=0.58, 10=0.546, 25=0.4916, 50=0.4368, 100=0.4186, 300=0.3822, 500=0.364, 1000=0.3003, 2500=0.273 (USD)", Stock 1=40303, Supplier 1=Digi-Key
P8: library part "Header 6", "Header, 6-Pin", Colour=Black, Current Rating=3A, Flammability Rating="UL94 V-0", Insulation Resistance=5GR, Manufacturer="Amphenol FCI", Manufacturer Part Number=68000-406HLF, Max Operating Temperature=125°C, Max Voltage Rating (AC)=1.5kV, Min Operating Temperature=-65°C, Package Quantity=100, Supplier Part Number 1=609-3263-ND, Connector Type="Male Pin", Contact Gender=Male, Contact Material=Bronze, Contact Mating Length=0.23inch, Contact Plating=Tin, Depth=2.41mm, Gender=Male, Housing Colour=Black, Housing Material=Thermoplastic, LatestRevisionDate=17-Jul-2002, LatestRevisionNote="Re-released for DXP Platform.", Length=15.24mm, Mating Post Length=5.84mm, Mount="Through Hole", Number of Contacts=6, Number of Positions=6, Number of Rows=1, Orientation=Straight, Packaging=Bulk, Pitch=2.54mm, Pricing 1="1=0.26, 10=0.245, 100=0.1695, 500=0.14344, 1000=0.11736, 5000=0.10432, 10000=0.09454 (USD)", Publisher="Altium Limited", Radiation Hardening=No, REACH SVHC="No SVHC", Stock 1=7266, Supplier 1=Digi-Key, Termination=Solder, Termination Post Length=2.41mm, Voltage Rating=1.5kV
Q1: library part MOSFET-P, "P-Channel MOSFET", Case/Package=SOT-23, Continuous Drain Current (ID)=2A, Current Rating=-2A, Drain to Source Breakdown Voltage=-20V, Drain to Source Resistance=60mR, Drain to Source Voltage (Vdss)=20V, Gate to Source Voltage (Vgs)=8V, Input Capacitance=779pF, Max Operating Temperature=150°C, Max Power Dissipation=500mW, Min Operating Temperature=-55°C, On-State Resistance=70MR, Package Quantity=1, Supplier Part Number 1=FDN340PDKR-ND, Threshold Voltage=-800mV, Contact Plating=Matte,Tin, Dual Supply Voltage=-20V, Element Configuration=Single, Fall Time=11ns, Height=0.94mm, Lead Free="Lead Free", Length=2.92mm, Manufacturer Part Number=FDN340P, Mount="Surface Mount", Nominal Vgs=-800mV, Number of Elements=1, Number of Pins=3, Packaging="Tape and Reel", Power Dissipation=500mW, Radiation Hardening=No, Rds On Max=70mR, REACH SVHC="No SVHC", Rise Time=9ns, Stock 1=0, Supplier 1=Digi-Key, Termination=SMD/SMT, Turn-Off Delay Time=27ns, Turn-On Delay Time=10ns, Voltage Rating (DC)=-20V, Weight=0.03g, Width=3.05mm
Q2 Q3: library part MOSFET-N, "N-Channel MOSFET", Case/Package=SOT-23, Continuous Drain Current (ID)=220mA, Drain to Source Breakdown Voltage=50V, Drain to Source Resistance=3.5R, Gate to Source Voltage (Vgs)=20V, Input Capacitance=27pF, Max Operating Temperature=150°C, Max Power Dissipation=360mW, Min Operating Temperature=-55°C, On-State Resistance=6R, Package Quantity=1, Supplier Part Number 1=BSS138CT-ND, Threshold Voltage=1.3V, Contact Plating=Matte,Tin, Current Rating=220mA, Drain to Source Voltage (Vdss)=50V, Dual Supply Voltage=50V, Element Configuration=Single, Fall Time=9ns, Height=0.93mm, Lead Free="Lead Free", Length=2.92mm, Manufacturer Part Number=BSS138, Mount="Surface Mount", Nominal Vgs=1.3V, Number of Elements=1, Number of Pins=3, Packaging="Tape and Reel", Power Dissipation=360mW, Radiation Hardening=No, Rds On Max=3.5R, REACH SVHC="No SVHC", Rise Time=9ns, Stock 1=0, Supplier 1=Digi-Key, Termination=SMD/SMT, Turn-Off Delay Time=20ns, Turn-On Delay Time=2.5ns, Voltage Rating (DC)=50V, Weight=0.03g, Width=1.3mm
R1: library part R, "Resistor", Case/Package=0603, Case Code (Metric)=1608, Manufacturer="Rohm Semiconductor", Manufacturer Part Number=ESR03EZPJ271, Max Operating Temperature=155°C, Max Power Dissipation=250mW, Min Operating Temperature=-55°C, Package Quantity=5000, Supplier Part Number 1=755-ESR03EZPJ271, Temperature Coefficient=200ppm/°C, Tolerance=5%, Case Code (Imperial)=0603, ComponentLink1Description=http://www.rohm.com/web/global/datasheet/ESR01MZPF/esr-e, ComponentLink1URL=http://www.rohm.com/web/global/datasheet/ESR01MZPF/esr-e, Composition="Thick Film", Features="Automotive AEC-Q200", Height=0.022inch, Length=0.063inch, Mount="Surface Mount", Number of Terminations=2, Packaging="Cut Tape", Pricing 1="1=0.1, 10=0.071, 50=0.071, 100=0.025, 1000=0.017, 10000=0.011 (USD)", Resistance=270R, Stock 1=13313, Supplier 1=Mouser, Width=0.031inch
R2: library part R, "Resistor", Case/Package=0805, Case Code (Metric)=2012, Manufacturer Part Number=ERA-6AEB105V, Max Operating Temperature=155°C, Max Power Dissipation=125mW, Min Operating Temperature=-55°C, Package Quantity=1, Resistance=1MR, Supplier Part Number 1=P1MDADKR-ND, Temperature Coefficient=25ppm/°C, Tolerance=1%, Voltage Rating=100V, Case Code (Imperial)=0805, Composition="Thin Film", Contact Plating=Tin, Depth=1.25mm, Features="Automotive AEC-Q200", Height=0.5mm, Lead Free="Lead Free", Length=2mm, Military Standard=Not, Mount="Surface Mount", Number of Pins=2, Number of Terminations=2, Packaging="Tape and Reel", Power Rating=125mW, Pricing 1="1=0.36, 10=0.302, 100=0.1182, 1000=0.04948, 2500=0.04536 (USD)", Radiation Hardening=No, REACH SVHC="No SVHC", Stock 1=150805, Supplier 1=Digi-Key, Termination=Solder, Voltage Rating (DC)=100V, Width=1.25mm, Working Voltage=100V
R3: library part R, "Resistor pull-up", Case/Package=0603, Case Code (Metric)=1608, Manufacturer Part Number=MCT06030C1003FP500, Max Operating Temperature=125°C, Max Power Dissipation=125mW, Min Operating Temperature=-55°C, Package Quantity=1, Power Rating=100mW, Resistance=100kR, Supplier Part Number 1=MCT0603-100K-CFDKR-ND, Temperature Coefficient=50ppm/°C, Tolerance=1%, Voltage Rating=75V, Case Code (Imperial)=0603, Composition="Thin Film", Contact Plating=Tin, Depth=0.85mm, Height=0.022inch, Lead Free="Lead Free", Length=1.55mm, Military Standard=Not, Mount="Surface Mount", Number of Terminations=2, Packaging="Tape and Reel", Pricing 1="1=0.18, 10=0.152, 100=0.0596, 1000=0.02495, 2500=0.02287 (USD)", Radiation Hardening=No, REACH SVHC=Unknown, Stock 1=0, Supplier 1=Digi-Key, Termination=SMD/SMT, Voltage Rating (DC)=75V, Weight=7.1E-05oz, Width=0.033inch
R4 R16 R17: library part R, "Resistor pull-up", Case/Package=0603, Case Code (Metric)=1608, Manufacturer Part Number=MCT06030C1002FP500, Max Operating Temperature=125°C, Max Power Dissipation=125mW, Min Operating Temperature=-55°C, Package Quantity=1, Power Rating=100mW, Resistance=10kR, Supplier Part Number 1=MCT0603-10.0K-CFDKR-ND, Temperature Coefficient=50ppm/°C, Tolerance=1%, Voltage Rating=75V, Case Code (Imperial)=0603, Composition="Thin Film", Contact Plating=Tin, Depth=0.85mm, Height=0.022inch, Lead Free="Lead Free", Length=1.55mm, Military Standard=Not, Mount="Surface Mount", Number of Terminations=2, Packaging="Tape and Reel", Pricing 1="1=0.18, 10=0.152, 100=0.0596, 1000=0.02495, 2500=0.02287 (USD)", Radiation Hardening=No, REACH SVHC=Unknown, Stock 1=1373195, Supplier 1=Digi-Key, Voltage Rating (DC)=75V, Width=0.8mm
R5: library part R, "Resistor", Case/Package=0603, Case Code (Metric)=1608, Manufacturer Part Number=AC0603FR-07560RL, Max Operating Temperature=155°C, Max Power Dissipation=100mW, Min Operating Temperature=-55°C, Supplier Part Number 1=YAG3618DKR-ND, Temperature Coefficient=100ppm/°C, Tolerance=1%, Voltage Rating=50V, Case Code (Imperial)=0603, Composition="Thick Film", Features="Automotive AEC-Q200,Moisture Resistant", Height=0.022inch, Lead Free="Lead Free", Length=0.063inch, Mount="Surface Mount", Number of Terminations=2, Packaging="Tape and Reel", Power Rating=100mW, Pricing 1="1=0.1, 10=0.032, 100=0.0129, 1000=0.00579, 2500=0.00502 (USD)", Resistance=560R, Stock 1=31951, Supplier 1=Digi-Key, Termination=SMD/SMT, Weight=7.1E-05oz, Width=0.8mm
R6 R7: library part R, "Resistor voltage divider", Case/Package=0603, Case Code (Metric)=1608, Manufacturer Part Number=MCT06030C1002FP500, Max Operating Temperature=125°C, Max Power Dissipation=125mW, Min Operating Temperature=-55°C, Package Quantity=1, Power Rating=100mW, Resistance=10kR, Supplier Part Number 1=MCT0603-10.0K-CFDKR-ND, Temperature Coefficient=50ppm/°C, Tolerance=1%, Voltage Rating=75V, Case Code (Imperial)=0603, Composition="Thin Film", Contact Plating=Tin, Depth=0.85mm, Height=0.022inch, Lead Free="Lead Free", Length=1.55mm, Military Standard=Not, Mount="Surface Mount", Number of Terminations=2, Packaging="Tape and Reel", Pricing 1="1=0.18, 10=0.152, 100=0.0596, 1000=0.02495, 2500=0.02287 (USD)", Radiation Hardening=No, REACH SVHC=Unknown, Stock 1=1373195, Supplier 1=Digi-Key, Voltage Rating (DC)=75V, Width=0.8mm
R8 R9: library part R, "Resistor USB", Case/Package=0603, Case Code (Metric)=1608, Manufacturer Part Number=MCT06030C1002FP500, Max Operating Temperature=125°C, Max Power Dissipation=125mW, Min Operating Temperature=-55°C, Package Quantity=1, Power Rating=100mW, Resistance=10kR, Supplier Part Number 1=MCT0603-10.0K-CFDKR-ND, Temperature Coefficient=50ppm/°C, Tolerance=1%, Voltage Rating=75V, Case Code (Imperial)=0603, Composition="Thin Film", Contact Plating=Tin, Depth=0.85mm, Height=0.022inch, Lead Free="Lead Free", Length=1.55mm, Military Standard=Not, Mount="Surface Mount", Number of Terminations=2, Packaging="Tape and Reel", Pricing 1="1=0.18, 10=0.152, 100=0.0596, 1000=0.02495, 2500=0.02287 (USD)", Radiation Hardening=No, REACH SVHC=Unknown, Stock 1=1373195, Supplier 1=Digi-Key, Voltage Rating (DC)=75V, Width=0.8mm
R10: library part R, "Resistor amp-op", Case/Package=0603, Case Code (Metric)=1608, Manufacturer Part Number=MCT06030C1002FP500, Max Operating Temperature=125°C, Max Power Dissipation=125mW, Min Operating Temperature=-55°C, Package Quantity=1, Power Rating=100mW, Resistance=10kR, Supplier Part Number 1=MCT0603-10.0K-CFDKR-ND, Temperature Coefficient=50ppm/°C, Tolerance=1%, Voltage Rating=75V, Case Code (Imperial)=0603, Composition="Thin Film", Contact Plating=Tin, Depth=0.85mm, Height=0.022inch, Lead Free="Lead Free", Length=1.55mm, Military Standard=Not, Mount="Surface Mount", Number of Terminations=2, Packaging="Tape and Reel", Pricing 1="1=0.18, 10=0.152, 100=0.0596, 1000=0.02495, 2500=0.02287 (USD)", Radiation Hardening=No, REACH SVHC=Unknown, Stock 1=1373195, Supplier 1=Digi-Key, Voltage Rating (DC)=75V, Width=0.8mm
R11 R14 R15: library part R, "Resistor MOSFET", Case/Package=0603, Case Code (Metric)=1608, Manufacturer Part Number=MCT06030C1002FP500, Max Operating Temperature=125°C, Max Power Dissipation=125mW, Min Operating Temperature=-55°C, Package Quantity=1, Power Rating=100mW, Resistance=10kR, Supplier Part Number 1=MCT0603-10.0K-CFDKR-ND, Temperature Coefficient=50ppm/°C, Tolerance=1%, Voltage Rating=75V, Case Code (Imperial)=0603, Composition="Thin Film", Contact Plating=Tin, Depth=0.85mm, Height=0.022inch, Lead Free="Lead Free", Length=1.55mm, Military Standard=Not, Mount="Surface Mount", Number of Terminations=2, Packaging="Tape and Reel", Pricing 1="1=0.18, 10=0.152, 100=0.0596, 1000=0.02495, 2500=0.02287 (USD)", Radiation Hardening=No, REACH SVHC=Unknown, Stock 1=1373195, Supplier 1=Digi-Key, Voltage Rating (DC)=75V, Width=0.8mm
R12 R13: library part R, "Resistor LED", Case/Package=0603, Case Code (Metric)=1608, Manufacturer Part Number=ESR03EZPJ102, Max Operating Temperature=155°C, Max Power Dissipation=250mW, Min Operating Temperature=-55°C, Package Quantity=1, Resistance=1kR, Supplier Part Number 1=RHM1.0KDDKR-ND, Temperature Coefficient=200ppm/°C, Tolerance=5%, Case Code (Imperial)=0603, Composition="Thick Film", Features="Automotive AEC-Q200", Height=0.022inch, Lead Free="Lead Free", Length=0.063inch, Mount="Surface Mount", Number of Terminations=2, Packaging="Tape and Reel", Pricing 1="1=0.1, 10=0.087, 100=0.0333, 1000=0.01464, 2500=0.01264 (USD)", Stock 1=384185, Supplier 1=Digi-Key, Width=0.031inch
S1: library part "SW Tact", "Tactile Switch", Case/Package=SMD/SMT, Colour=Black, Contact Resistance=100mR, Current Rating=50mA, Manufacturer Part Number=PTS645SM43SMTR92LFS, Max Operating Temperature=60°C, Max Voltage Rating (DC)=12V, Min Operating Temperature=-20°C, Operating Force=160gf, Package Quantity=1000, Supplier Part Number 1=CKN9112DKR-ND, Actuator Length=0.85mm, Actuator Material=Nylon,Polyamide, Actuator Type=Standard, Contact Material=Silver, Contact Plating=Silver, Depth=9mm, Illumination Type=Illuminated,Non-Illuminated, Lead Free="Lead Free", Length=6mm, Max Current Rating=50mA, Mechanical Life=100000Cycles, Mount="Surface Mount", Orientation=Straight, Packaging="Tape and Reel", Pricing 1="1=0.16, 10=0.157, 25=0.1516, 50=0.1462, 100=0.1381, 250=0.12996, 500=0.12452 (USD)", REACH SVHC="No SVHC", Stock 1=477790, Supplier 1=Digi-Key, Switch Function=Off-Mom, Termination="Gull Wing", Throw Configuration=SPST, Voltage Rating (DC)=12V
U1: "8-bit AVR Microcontroller, 32KB Flash, 1KB EEPROM, 2KB SRAM, 28-pin PDIP, Industrial Grade (-40°C to 85°C)", Case/Package=PDIP, Frequency=20MHz, Manufacturer="Microchip / Atmel", Manufacturer Part Number=ATMEGA328P-PU, Max Operating Temperature=85°C, Max Supply Voltage=5.5V, Min Operating Temperature=-40°C, Min Supply Voltage=1.8V, Package Quantity=14, Supplier Part Number 1=ATMEGA328P-PU-ND, ComponentLink1Description="Manufacturer URL", ComponentLink1URL=http://www.atmel.com/, ComponentLink2Description="ATmega48A/48PA/88A/88PA/168A/168PA/328/328P Datasheet", ComponentLink2URL=http://www.atmel.com/dyn/resources/prod_documents/8271.pdf, ComponentLink3Description="ATmega48A/48PA/88A/88PA/168A/168PA/328/328P Summary", ComponentLink3URL=http://www.atmel.com/dyn/resources/prod_documents/8271S.pdf, ComponentLink4Description=http://www.farnell.com/datasheets/2047852.pdf, ComponentLink4URL=http://www.farnell.com/datasheets/2047852.pdf, ComponentLink5Description=http://www.rapidonline.com/pdf/73-4283.pdf, ComponentLink5URL=http://www.rapidonline.com/pdf/73-4283.pdf, ComponentLink6Description=http://www.microchip.com/mymicrochip/filehandler.aspx?ddocname=en589968, ComponentLink6URL=http://www.microchip.com/mymicrochip/filehandler.aspx?ddocname=en589968, ComponentLink7Description=http://datasheet.iiic.cc/atmel/ATMEGA328P-PU.pdf, ComponentLink7URL=http://datasheet.iiic.cc/atmel/ATMEGA328P-PU.pdf, ComponentLink8Description=http://www.produktinfo.conrad.com/datenblaetter/150000-174999/155197-da-01-en-MICROCONTR_ATMEGA328P_PU_8BIT_PDIP_28.pdf, ComponentLink8URL=http://www.produktinfo.conrad.com/datenblaetter/150000-174999/155197-da-01-en-MICROCONTR_ATMEGA328P_PU_8BIT_PDIP_28.pdf, Contact Plating=Matte,Tin, Core Architecture=AVR, Data Bus Width=8b, DatasheetVersion="revD, May-2011", Height=3.28mm, Interface=2-Wire,I2C,SPI,UART,USART, Lead Free="Lead Free", Length=37.4mm, Max Frequency=20MHz, Memory Size=32KB, Memory Type=FLASH, Mount="Through Hole", Number of ADC Channels=6, Number of I2C Channels=1, Number of I/Os=23, Number of Pins=28, Number of Programmable I/O=23, Number of PWM Channels=6, Number of SPI Channels=1, Number of Timers/Counters=3, Oscillator Type=Internal, PackageDescription="28-lead (0.300\"/7.62mm Wide) Plastic Dual Inline Package (PDIP)", PackageReference=28P3, PackageVersion="revB, Sep-2001", Packaging=Rail/Tube, Peripherals="Brown-out Detect/Reset,POR,PWM,WDT", Pricing 1="1=2.14, 25=1.9672, 100=1.7819 (USD)", Radiation Hardening=No, RAM Size=2KB, REACH SVHC="No SVHC", Stock 1=12517, Supplier 1=Digi-Key, Watchdog Timer=Yes, Width=6.76mm
U2: library part Regulator, "5V supplier", Case/Package=SOT-223, Dropout Voltage=1.2V, Input Bias Current=6mA, Manufacturer Part Number=NCP1117ST50T3G, Max Input Voltage=20V, Max Operating Temperature=125°C, Max Output Current=1A, Min Input Voltage=3.5V, Min Operating Temperature=0°C, Nominal Output Voltage=5V, Output Voltage Accuracy=1%, Package Quantity=1, Power Rating=781mW, Quiescent Current=10mA, Supplier Part Number 1=NCP1117ST50T3GOSDKR-ND, Accuracy=1%, ComponentLink1Description=http://www.onsemi.com/pub/Collateral/NCP1117-D.PDF, ComponentLink1URL=http://www.onsemi.com/pub/Collateral/NCP1117-D.PDF, ComponentLink2Description=http://www.onsemi.ru.com/pub/Collateral/NCP1117-D.PDF, ComponentLink2URL=http://www.onsemi.ru.com/pub/Collateral/NCP1117-D.PDF, ComponentLink3Description=http://www.farnell.com/datasheets/1748260.pdf, ComponentLink3URL=http://www.farnell.com/datasheets/1748260.pdf, ComponentLink4Description=http://www.onsemi.com/pub_link/Collateral/NCP1117-D.PDF, ComponentLink4URL=http://www.onsemi.com/pub_link/Collateral/NCP1117-D.PDF, ComponentLink5Description=http://www.farnell.com/datasheets/1878391.pdf, ComponentLink5URL=http://www.farnell.com/datasheets/1878391.pdf, Contact Plating=Matte,Tin, Halogen Free="Halogen Free", Height=1.69mm, Lead Free="Lead Free", Length=6.7mm, Min Current Limit=1A, Mount="Surface Mount", Number of Outputs=1, Number of Pins=4, Number of Regulators=1, Output Current=1A, Output Type=Fixed, Output Voltage=5V, Packaging="Tape and Reel", Polarity=Positive, Pricing 1="1=0.54, 10=0.458, 100=0.3423, 500=0.26896, 1000=0.20783 (USD)", Radiation Hardening=No, REACH SVHC="No SVHC", Stock 1=10748, Supplier 1=Digi-Key, Tolerance=1%, Width=3.7mm